# EAGLE board ISTS_V1.3 (EAGLE 9.6.2)
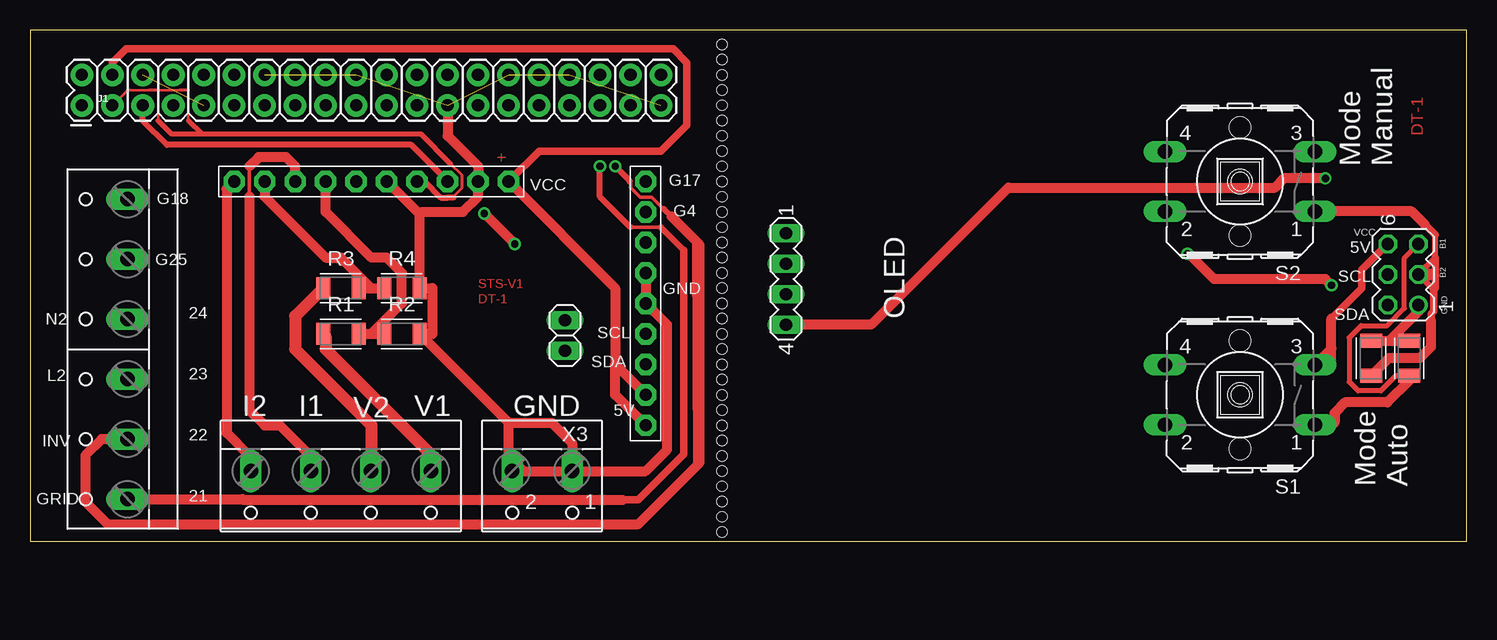
[diagram p0: board, top side]
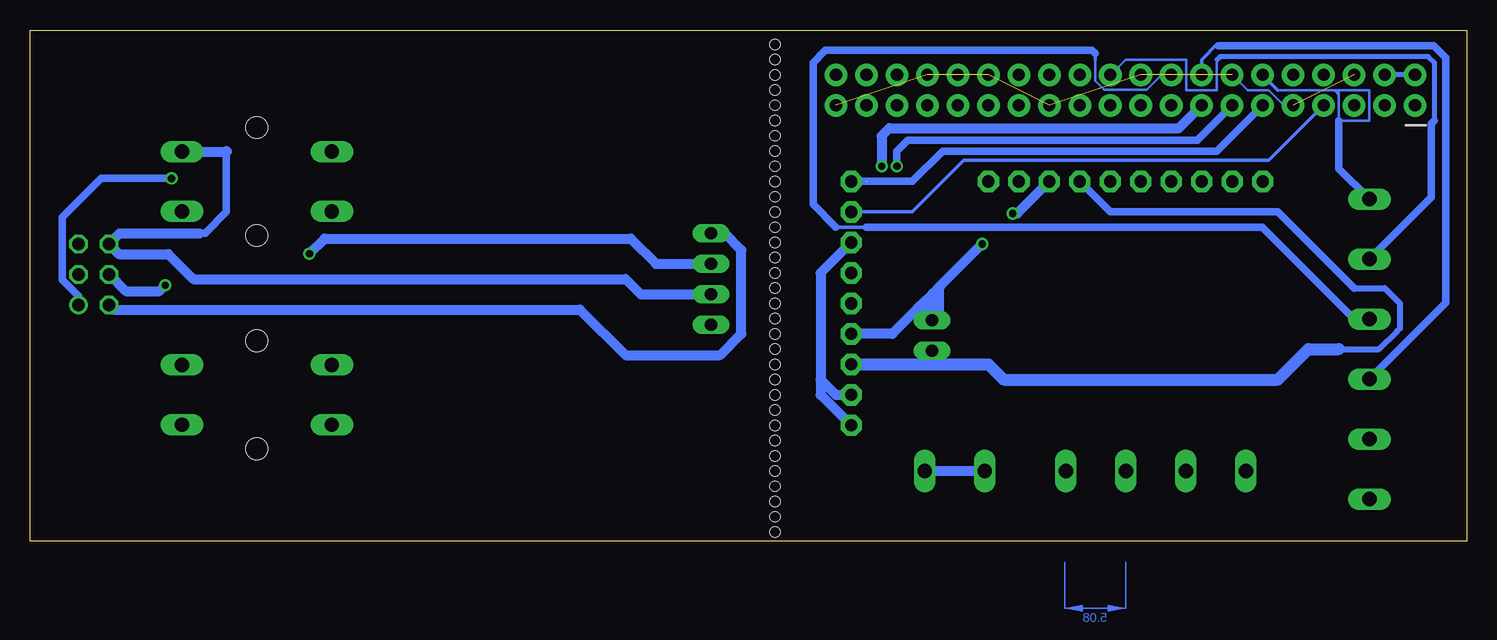
[diagram p1: board, bottom side, seen from below]

Size 119.74 x 42.6 mm. Coordinates in mm from the lower left corner, seen from the top.
Outline: 0,0 119.74,0 119.74,42.6 0,42.6 0,0
Copper layers (1*16): Top 0.035mm / dielectric 1.5mm / Bottom 0.035mm
Design rules "default *": minimum track width 8mil, minimum drill 0.6mm, track to track 10mil, track to pad 6mil, pad to pad 6mil, via to via 6mil, smd to smd 6mil, copper to edge 40mil, drill to drill 6mil, minimum pad ring 10mil, minimum via ring 8mil, stop-mask expansion 4mil, vias tented up to drill 0mil, thermal gap 10mil
Net classes: 0 default: clearance 0.205 mm
Holes 0.85 mm at 57.66,0.76 57.66,2.03 57.66,3.3 57.66,4.57 57.66,5.84 57.66,7.11 57.66,8.38 57.66,9.65 57.66,10.92 57.66,12.19 57.66,13.46 57.66,14.73 57.66,16 57.66,17.27 57.66,18.54 57.66,19.81 57.66,21.08 57.66,22.35 57.66,24.89 57.66,23.62 57.66,26.16 57.66,27.43 57.66,28.7 57.66,29.97 57.66,31.24 57.66,32.51 57.66,33.78 57.66,35.05 57.66,36.32 57.66,37.59 57.66,38.86 57.66,40.13 57.66,41.4

## Footprints (pad centres in the part's own frame; a part is rotated, then mirrored left to right if it is on the bottom)
2X20 = drill 1.016 pad 1.88: 1 0,0; 2 0,2.54; 3 2.54,0; 4 2.54,2.54; 5 5.08,0; 6 5.08,2.54; 7 7.62,0; 8 7.62,2.54; 9 10.16,0; 10 10.16,2.54; 11 12.7,0; 12 12.7,2.54; 13 15.24,0; 14 15.24,2.54; 15 17.78,0; 16 17.78,2.54; 17 20.32,0; 18 20.32,2.54; 19 22.86,0; 20 22.86,2.54; 21 25.4,0; 22 25.4,2.54; 23 27.94,0; 24 27.94,2.54; 25 30.48,0; 26 30.48,2.54; 27 33.02,0; 28 33.02,2.54; 29 35.56,0; 30 35.56,2.54; 31 38.1,0; 32 38.1,2.54; 33 40.64,0; 34 40.64,2.54; 35 43.18,0; 36 43.18,2.54; 37 45.72,0; 38 45.72,2.54; 39 48.26,0; 40 48.26,2.54
1X09-BIG = drill 1.016 pad 1.778 octagon: 1 -10.16,0; 2 -7.62,0; 3 -5.08,0; 4 -2.54,0; 5 0,0; 6 2.54,0; 7 5.08,0; 8 7.62,0; 9 10.16,0
1X02 = drill 1.016 long: 1 -1.27,0; 2 1.27,0
RESC3216X70 = smd 1.165 x 1.815: 1 -1.475,0; 2 1.475,0
B3F-40XX = drill 1.194 long: 1 -6.248,2.489; 2 6.248,2.489; 3 -6.248,-2.489; 4 6.248,-2.489 | hole 1.803: 0,-4.496; 0,4.496
MA03-2 = drill 1.016: 1 -2.54,-1.27 | drill 1.016 octagon: 2 -2.54,1.27; 3 0,-1.27; 4 0,1.27; 5 2.54,-1.27; 6 2.54,1.27
MA04-1 = drill 1.016 long: 1 -3.81,0; 2 -1.27,0; 3 1.27,0; 4 3.81,0
1X10-BIG = drill 1.016 pad 1.778 octagon: 1 -11.43,0; 2 -8.89,0; 3 -6.35,0; 4 -3.81,0; 5 -1.27,0; 6 1.27,0; 7 3.81,0; 8 6.35,0; 9 8.89,0; 10 11.43,0
W237-4 = drill 1.194 long: 1 -7.5,-1.27; 2 -2.5,-1.27; 3 2.5,-1.27; 4 7.5,-1.27
W237-136 = drill 1.194 long: 1 -12.5,-1.27; 2 -7.5,-1.27; 3 -2.5,-1.27; 4 2.5,-1.27; 5 7.5,-1.27; 6 12.5,-1.27
W237-102 = drill 1.194 long: 1 -2.5,-1.27; 2 2.5,-1.27

## Placement (x,y rotation side)
J1  RASPBERRYPI-40-PIN-GPIO_PTH_NO_SHROUD  [2X20]  4.32,36.32 0 top
JP1  [1X09-BIG]  51.31,19.81 90 top
JP2  [1X02]  44.58,17.15 90 top
R1  20K  [RESC3216X70]  25.91,17.27 0 top
R2  10K  [RESC3216X70]  30.99,17.27 0 top
R3  20K  [RESC3216X70]  25.91,21.08 0 top
R4  10K  [RESC3216X70]  30.99,21.08 0 top
R5  10K  [RESC3216X70]  111.76,15.24 90 top
R6  10K  [RESC3216X70]  114.94,15.24 90 top
S1  [B3F-40XX]  100.84,12.19 180 top
S2  [B3F-40XX]  100.84,29.97 180 top
SV1  [MA03-2]  114.43,22.23 90 top
SV2  [MA04-1]  62.99,21.84 270 top
U$1  PINHD-1X10  [1X10-BIG]  28.45,29.97 180 top
X1  [W237-4]  25.91,4.57 180 top
X2  [W237-136]  6.86,16 90 top
X3  [W237-102]  42.67,4.57 180 top

## Library data of the parts
J1 = SparkFun-Connectors
JP1 U$1 = adafruit
JP2 = pinhead
R1-R6 = Resistor; CATEGORY: Resistor; SUB-CATEGORY: Fixed
S1 S2 = switch-omron; MF: OMRON COMPONENTS USA; MPN: B3F-4000; OC_FARNELL: 176434; OC_NEWARK: 36K3105
SV1 SV2 = con-lstb; OC_FARNELL: unknown; OC_NEWARK: unknown
X1 = con-wago-500; OC_FARNELL: unknown; OC_NEWARK: unknown
X2 = con-wago-500; MPN: 237-136; OC_FARNELL: unknown; OC_NEWARK: 84K9151
X3 = con-wago-500; MPN: 237-102; OC_FARNELL: unknown; OC_NEWARK: 70K9898

## Nets
3.3V: J1.17
5V: S1.3 S2.3 SV1.6 SV2.3
GND: J1.6 J1.9 J1.14 J1.20 J1.25 J1.30 J1.34 J1.39 JP1.5 JP1.6 R2.2 R4.2 U$1.2 U$1.5 X3.1 X3.2
N$1: J1.13 X2.1
N$2: J1.15 X2.2
N$3: R1.1 X1.1
N$4: J1.2 J1.4 JP1.1 JP1.2 JP1.7 U$1.1
N$5: SV1.4 SV2.2
N$6: R3.1 X1.2
N$7: R5.2 R6.2 SV1.1 SV2.4
N$8: J1.5 JP1.4 JP2.2 U$1.3
N$9: U$1.8 X1.3
N$10: U$1.10 X1.4
N$11: J1.16 X2.3
N$12: R1.2 R2.1 U$1.7
N$13: J1.18 X2.4
N$14: J1.22 X2.5
N$15: J1.12 X2.6
N$16: J1.11 JP1.9
N$17: J1.7 JP1.8
N$18: SV1.2 SV2.1
N$19: R6.1 S1.1 SV1.5
N$21: R5.1 S2.1 SV1.3
N$23: J1.3 JP1.3 JP2.1 U$1.4
N$27: J1.1
VIN2: R3.2 R4.1 U$1.9

## Tracks (layer width: path | path; a pad name or v marks a point on that pad's centre or on a via)
5V
  Top 0.61: 108.41,16 108.46,16 108.46,18.54 111,21.08 111,22.61 SV1.6
  Top 0.813: 108.46,18.54 108.46,16.05 S1.3 108.36,14.68 108.41,14.73 108.41,16
  Bottom 0.61: 105.61,25.65 105.16,25.65 103.38,27.43 103.38,32.51
  Bottom 0.813: 105.61,25.65 112.27,25.65 SV1.6 112.32,23.93 108.2,23.93 106.12,21.84 70.1,21.84 68.83,20.57 SV2.3 | S2.3 103.33,32.46 103.38,32.51
GND  (6 unrouted)
  Top 0.813: 39.88,9.86 R2.2 33.53,17.27 33.53,21.08 R4.2 32.46,27.23 | 39.88,9.86 39.88,7.11 41.15,5.84 X3.1 | 39.88,9.86 43.48,9.86 45.17,8.17 X3.1 | X3.1 51.31,5.84 53.09,7.62 53.09,18.03 JP1.5 JP1.6 | J1.25 34.8,33.78 37.34,31.24 U$1.2 37.34,28.7 36.07,27.43 32.67,27.43 32.46,27.23 | U$1.5 32.46,27.23
  Bottom 0.203: J1.14 18.26,37.57 16.5,37.57 15.25,36.32 J1.9
  Bottom 0.813: X3.2 X3.1
N$1  (via drill 0.6)
  Top 0.305: 52.58,26.16 50.04,26.16
  Top 0.508: 54.48,24.26 52.58,26.16 | 50.04,26.16 47.5,28.7 v47.5,31.24
  Top 0.61: 49.39,3.44 50.68,3.44 54.48,7.24 54.48,24.26
  Top 0.813: X2.1 17.72,3.5 17.78,3.44 49.39,3.44
  Bottom 0.61: J1.13 22.48,33.4 46.61,33.4 47.5,32.51 v47.5,31.24
N$2  (via drill 0.6)  (1 unrouted)
  Top 0.305: 50.04,29.97 50.06,29.95 50.06,29.46 50.84,28.68 51.82,28.68 52.82,27.68 | 55.5,25 55.5,6.22 55.12,5.84
  Top 0.508: v48.77,31.24 49.96,30.05 49.96,29.97 | 52.82,27.68 53.46,27.04 55.4,25.1 55.4,25 | 55.4,25 55.4,24.89 | 55.4,25 55.46,6.22 55.46,6.18 55.12,5.84 50.55,1.27
  Top 0.813: X2.2 5.96,8.5 4.61,7.15 4.61,3.3 6.49,1.42 50.7,1.42 55.12,5.84 55.81,6.53 55.81,24.69 53.46,27.04
  Bottom 0.813: J1.15 24,34.42 48.13,34.42 48.77,33.78 v48.77,31.24
N$3
  Top 1.016: X1.1 33.41,7.23 24.64,16 24.64,17.07 R1.1
N$4
  Top 0.61: J1.4 6.86,39.88 8,41.02 53.59,41.02 54.74,39.88 54.74,34.67 52.58,32.51 42.42,32.51 U$1.1
  Top 0.813: U$1.1 48.77,21.08 48.77,14.73 | 48.77,14.73 JP1.2 | JP1.1 48.77,12.19 48.77,14.73
  Bottom 0.406: J1.2 J1.4
  Bottom 0.813: JP1.7 53.85,22.35 53.85,13.46 | 53.85,13.46 52.58,12.19 JP1.2 | 53.85,13.46 53.85,12.19 JP1.1
N$5  (via drill 0.6)
  Top 0.813: v108.46,21.34 107.95,21.84 98.68,21.84 96.52,24 v96.46,23.94
  Bottom 0.813: SV1.4 111.76,20.83 108.97,20.83 v108.46,21.34 | v96.46,23.94 95.19,25.21 69.66,25.21 67.56,23.11 SV2.2
N$6  (1 unrouted)
  Top 0.813: 28.45,7.11 28.45,5.84
  Top 1.016: R3.1 22.1,18.75 22.1,16 28.45,9.65 28.45,7.11
N$7  (via drill 0.6)
  Top 0.813: R5.2 113.28,16.71 | 113.28,16.71 R6.2 | 113.28,16.71 115.7,19.13 SV1.1 | v107.95,30.23 104.52,30.23 103.76,29.46 81.53,29.46 70.1,18.03 SV2.4
  Bottom 0.61: SV1.1 115.7,20.43 117.04,21.77 117.04,26.98 113.79,30.23 v107.95,30.23
N$8  (via drill 0.6)
  Top 0.508: U$1.3 31.75,33.02 11.43,33.02 9.4,35.05 J1.5
  Top 0.813: v37.85,27.3 v40.39,24.76
  Bottom 0.61: 43.88,21.27 43.88,19.11 JP2.2 45.53,19.37 45.78,19.37
  Bottom 0.813: v37.85,27.3 37.47,27.3 U$1.3 | 45.15,20 45.78,19.37 47.88,17.27 JP1.4 | 45.15,20 44.51,20.64 | 44.51,20.64 43.88,21.27 v40.39,24.76 | JP2.2 44.58,18.54 | 44.58,18.54 44.58,19.43 44.96,19.81 | 44.96,19.81 45.15,20 | 45.15,20 45.15,19.11 44.58,18.54 | 44.51,20.64 44.51,20.26 44.96,19.81
  Bottom 1.016: JP2.2 44.51,18.48 44.51,20.26
N$9
  Top 0.305: 18.29,31.24 18.29,28.7
  Top 0.61: X1.3 23.37,5.88 23.37,7.11
  Top 0.813: U$1.8 22.1,31.24 21.34,32 19.05,32 18.29,31.24 | 18.29,28.7 18.29,10.92 19.56,9.65 20.83,9.65 23.37,7.11
N$10
  Top 0.61: X1.4 18.29,5.96 18.29,7.11
  Top 0.813: U$1.10 16.38,29.34 16.38,9.02 18.29,7.11
N$11
  Bottom 0.305: 1.78,40.13 1.78,40.29 1.78,40.41 2.77,41.4 20.83,41.4 22.1,40.13 J1.16
  Bottom 0.61: 1.78,40.13 1.78,19.85 5.61,16.02 X2.3 | 1.78,40.29 2.77,41.27 20.7,41.27
N$12
  Top 0.813: R1.2 28.45,17.27 | 28.45,17.27 R2.1 | U$1.7 24.64,27.43 28.45,23.62 29.72,23.62 30.99,22.35 30.99,19.81 28.45,17.27
N$13
  Bottom 0.203: J1.18 25.41,38.86 26.66,37.62 30.23,37.62 30.99,38.37 30.99,40.13
  Bottom 0.305: 50.04,26.16 52.58,26.16 | 30.99,40.64 30.99,40.13
  Bottom 0.61: X2.4 9.4,18.5 17.06,26.16 50.04,26.16 | 52.58,26.16 54.48,28.07 54.48,39.88 53.47,40.89 31.24,40.89 30.99,40.64
N$14
  Bottom 0.203: 20.83,40.13 20.83,37.59 23.37,37.59 23.37,40.13 28.45,40.13 J1.22
  Bottom 0.305: 2.86,28.77 2.99,28.64 | 8.07,23.56 X2.5 | 2.7,39.87 2.71,35.05
  Bottom 0.406: 2.71,35.05 2.7,35.07 2.7,39.87 3.21,40.39 20.57,40.39 20.83,40.13
  Bottom 0.61: 8.07,23.56 2.99,28.64 2.99,34.77 2.71,35.05
N$15
  Bottom 0.203: 10.86,37.4 11.05,37.59 | 11.05,37.59 15.75,37.59 | 10.67,37.59 8.13,37.59 8.13,35.05 10.67,35.05 10.67,37.21 | 10.86,37.4 10.67,37.59 | 10.67,37.59 11.05,37.59 | 10.67,37.21 10.86,37.4 | 10.67,37.59 10.67,37.21
  Bottom 0.305: 15.75,37.59 J1.12
  Bottom 0.508: 8.23,28.6 X2.6
  Bottom 0.61: 10.67,35.05 10.67,31.04 8.23,28.6
N$16
  Bottom 0.61: JP1.9 46.23,29.97 43.69,32.51 20.83,32.51 J1.11
N$17
  Bottom 0.305: J1.7 16.51,31.75 41.91,31.75 46.23,27.43 JP1.8
N$18
  Bottom 0.813: SV1.2 112.78,19.3 73.91,19.3 70.1,15.49 62.23,15.49 60.45,17.27 60.45,24.26 61.85,25.65 SV2.1
N$19
  Top 0.406: SV1.5 114.53,23.59 114.53,19.4 113.09,17.96 110.94,17.96 109.94,16.96 109.94,13.27 110.68,12.52 112.58,12.52 113.83,13.76 R6.1
  Top 0.813: R6.1 114.94,13.38 113.11,11.56 109.6,11.56 108.71,10.67 108.71,9.91 108.46,9.65 107.14,9.65 S1.1
N$21
  Top 0.406: 116.76,18.03 116.76,16.46
  Top 0.508: 116.97,20.95 SV1.3 117.09,23.62 117.09,25.53 | 116.76,18.36 116.76,18.03
  Top 0.61: 116.76,18.36 116.76,18.95 116.97,19.16 116.97,20.95 117.09,21.08 117.09,23.62 | 117.09,25.53 116.27,26.35
  Top 0.813: R5.1 113.26,15.27 115.84,15.27 116.76,16.19 116.76,18.36 | 116.27,26.35 115.14,27.48 S2.1
  Top 1.016: SV1.3 116.59,22.23
N$23
  Top 0.203: 13.21,35.05 13.21,37.59 | 8.13,37.59 9.93,37.59 | 10.67,35.05 10.67,37.59 12.47,37.59
  Top 0.254: 34.8,28.62 34.92,28.75 35.3,28.75 36.02,29.47 36.02,30.48 35.03,31.47 | 13.21,37.59 12.47,37.59 | J1.3 8.13,37.59 | 10.67,37.59 9.93,37.59
  Top 0.406: 35.03,31.47 32.59,33.91 14.35,33.91 | 14.35,33.91 11.81,33.91 10.67,35.05 | 14.35,33.91 13.21,35.05
  Top 0.508: 35.31,28.62 34.8,28.62 34.24,28.62 32.89,29.97 U$1.4
  Bottom 0.305: 5.59,17.74 5.82,17.51
  Bottom 0.508: 9.4,21.08 6.86,21.08 5.59,19.81 5.59,17.74 | 5.82,17.51 7.33,16 10.67,16
  Bottom 0.61: 39.88,14.73 43.69,14.73 | JP1.3 45.72,14.73 | 45.72,14.73 43.69,14.73 | 9.4,21.08 15.75,27.43 29.72,27.43 U$1.4 | 43.69,14.73 43.69,14.99 44.2,15.49 | 45.34,15.11 45.72,14.73
  Bottom 1.016: JP1.3 39.88,14.73 38.61,13.46 15.75,13.46 13.21,16 10.67,16 | 44.2,15.49 JP2.1 45.34,15.11
VIN2
  Top 0.813: R3.2 28.45,21.08 | 28.45,21.08 R4.1 | U$1.9 19.56,28.7 24.64,23.62 25.91,23.62 28.45,21.08
(copper drawn outside any net)
  shapes: Bottom area x1

## Text on the board
Top: DT-1 | + | STS-V1 | DT-1
tNames: Mode / Manual | G17 | VCC | G18 | G4 | VCC | 5V | B1 | G25 | SCL | B2 | GND | GND | SDA | 24 | OLED | N2 | SCL | SDA | 23 | L2 | I2 | I1 | V1 | GND | 5V | V2 | 22 | INV | Mode / Auto | GRID | 21